# EAGLE board breakout (EAGLE 7.7.0)

Size 40 x 20 mm. Coordinates in mm from the lower left corner, seen from the top.
Outline: 0,0 40,0 40,20 0,20 0,0
Copper layers used: 

## Footprints (pad centres in the part's own frame; a part is rotated, then mirrored left to right if it is on the bottom)
PAD1 = smd 1 x 0.5: 1 0,0

## Placement (x,y rotation side)
P1  [PAD1]  5,5 0 top
P2  [PAD1]  15,5 0 top
P3  [PAD1]  25,5 0 top
P4  [PAD1]  35,5 0 top
P5  [PAD1]  5,15 0 top
P6  [PAD1]  15,15 0 top
P7  [PAD1]  25,15 0 top
P8  [PAD1]  35,15 0 top

## Library data of the parts
P1-P8 = stub

## Nets
SIG1: P1.1 P2.1
SIG2: P3.1 P4.1
SIG3: P5.1 P6.1
SIG4: P7.1 P8.1